# Altium PCB Notecarier-F.PcbDoc (part 2 of 3)
Units mm, origin at the board's own origin, x right, y up, seen from the top; angles counter-clockwise.
Board outline 50.8 x 103 mm, 4 copper layers (Top Layer, Mid Layer 3, Mid Layer 4, Bottom Layer), stack 1.58 mm thick; 102 components, 110 nets, 555 pads, 589 vias.
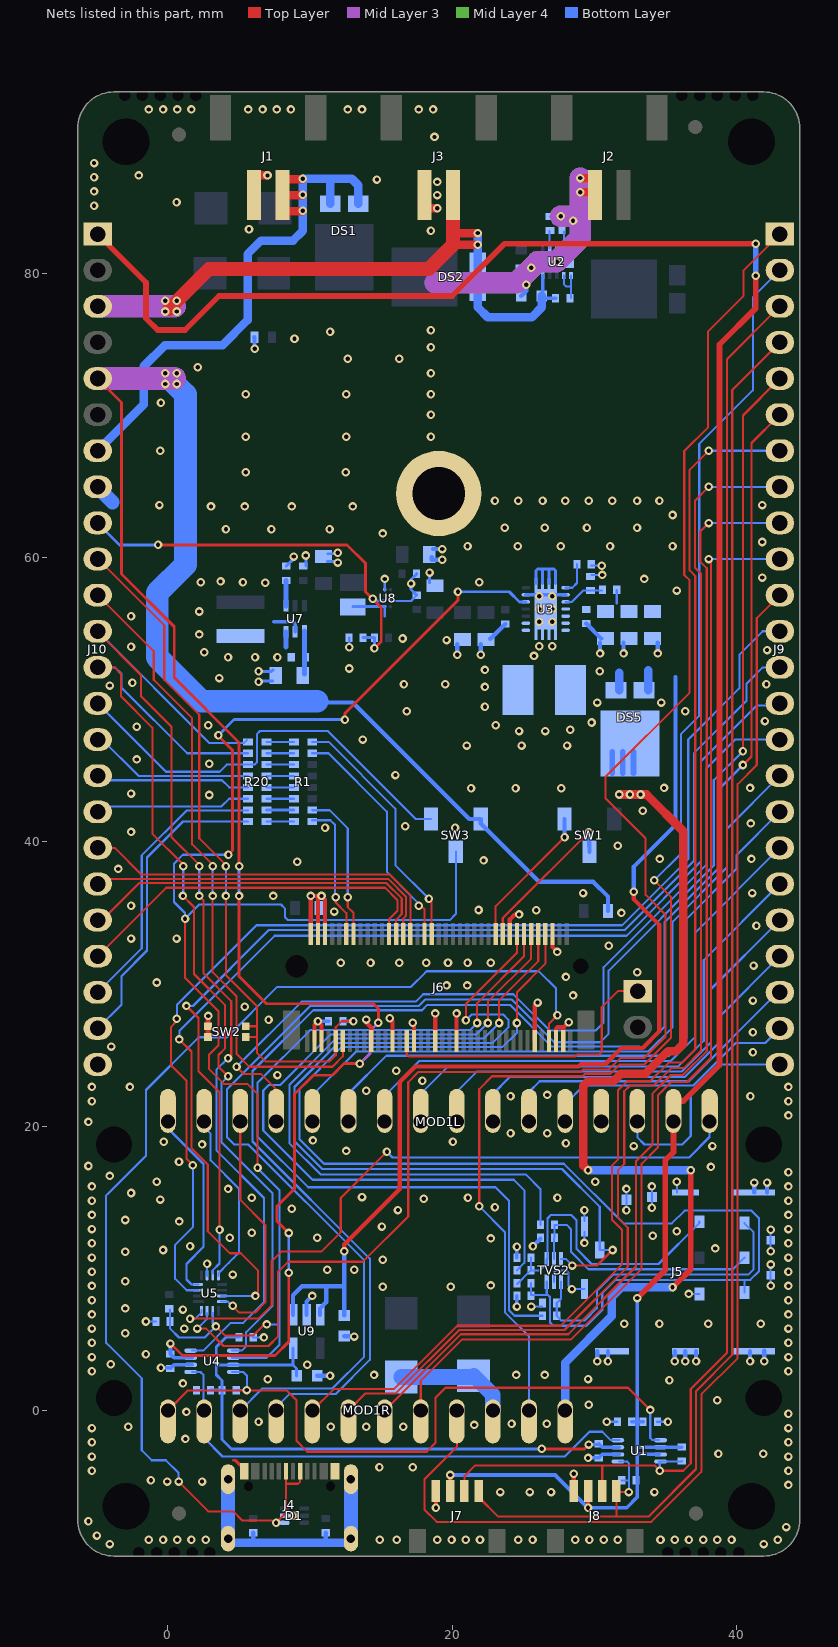
[diagram p4: the nets of this part, all layers, seen from the top]

## Via types
v1: diameter 0.6, hole 0.3, Top Layer to Bottom Layer, tented both sides, 589 vias

## Nets (pads, with @x,y where several pads share a name; then routed paths per layer and width w, separated by ;. In a path a pad name is that pad's centre, name@x,y a point inside that pad or via, vN(x,y) a via of type N, cw(c..) or ccw(c..) an arc to the next point about the centre after c; other vN are vias at no path point) (continued)
D_P: D1.1 J4.A6 J4.B6 J6.7 | length 82
  Top Layer w0.15: v1(0.75,-5) 0.75,-5.013 2.837,-7.1 4.593,-7.1 5.243,-7.75 7.328,-7.75 7.478,-7.9 v1(7.6,-7.9) 8.3,-7.2 8.3,-5.2 ; J4.A6@8.3,-4.267 8.3,-5.02 8.3,-5.2 ; J4.B6@9.275,-4.292 J4.B6@9.3,-4.267 9.3,-5.01 9.15,-5.16 8.34,-5.16 8.3,-5.2 ; J6.7@26.8,25.985 26.8,27.2 v1(27.4,27.8)
  Bottom Layer w0.15: v1(0.75,-5) 0.75,-4.4 -0.15,-3.5 -1.145,-3.5 -1.85,-2.795 -1.85,2.255 -4.247,4.653 -4.35,4.755 -4.35,15.13 -4.247,15.232 -1.55,17.93 -1.55,22.545 2.165,26.26 4.15,26.26 7.69,29.8 17.1,29.8 18.1,30.8 18.203,30.903 26.092,30.903 27.3,29.695 27.3,27.9 v1(27.4,27.8)
EN_F_BAT: C15.2 R18.2 SW3.2 U3.12 U4.6 U5.14 | length 118
  Top Layer w0.15: v1(1.2,34.6) 1.2,30.435 3.55,28.085 3.55,25.685 2.875,25.01 2.875,24.035 3.95,22.96 5.6,22.96 6.325,22.235 6.3,22.21 v1(6.3,17.08) ; v1(3.375,5.915) 4.005,5.285 6.01,5.285 6.225,5.5 6.775,6.05 v1(6.95,6.05)
  Top Layer w0.2: v1(3.55,47.5) 3.55,47.45 4.55,46.45 4.55,39.4 v1(4.25,39.1) ; v1(12.45,48.6) 12.45,49.05 20.4,57 v1(20.4,57.6)
  Bottom Layer w0.15: R18.2@0.15,7.11 C15.2@0.15,6.26 0.15,5.76 0.775,5.135 2.595,5.135 v1(3.375,5.915) 3.15,6.14 U5.14@3.15,6.86 ; v1(4.25,39.1) 1.05,39.1 0.425,38.475 0.425,35.775 1.2,35 v1(1.2,34.6) 2.2,35.6 7.95,35.6 8.225,35.325 8.225,34.718 8.443,34.5 19.825,34.5 20.25,34.925 SW3.2@20.25,39.31 ; U4.6@4.505,3.71 6.925,3.71 7.85,4.635 7.85,6.05 ; v1@6.3,17.043 7.85,15.493 7.85,6.05 ; v1(6.95,6.05) 7.85,6.05
  Bottom Layer w0.2: v1(3.55,47.5) 4.65,48.6 v1(12.45,48.6) ; v1(20.4,57.6) 24.01,57.6 24.725,56.885 U3.12@25.175,56.885
F_3V3: C12.1 J7.3 J8.3 J10.1 MOD1L.2 R10.2 R15.2 R16.1 U1.6 U1.7 | length 165.5
  Top Layer w0.3: J7.3@19.85,-5.651 v1(19.85,-4.54) ; v1(29.55,-6.851) J8.3@29.55,-5.651
  Top Layer w0.4: J10.1@-4.95,82.76 -1.55,79.36 -1.55,76.835 -0.725,76.01 1.205,76.01 3.595,78.4 19.99,78.4 23.675,82.085 v1(41.35,82.085) ; v1(33.02,7.91) 34.975,9.865 34.975,17.585 35.56,18.17 MOD1L.2@35.56,19.92 ; MOD1L.2@35.56,21.77 36.27,21.77 38.8,24.3 38.8,75 41.35,77.55 v1(41.35,79.835)
  Bottom Layer w0.25: v1(29.55,-6.851) 32.264,-6.851 33.025,-6.09 33.025,-3.09 ; C12.1@32.625,-0.79 33.025,-0.79 ; v1(33.02,7.91) 33.025,7.905 33.025,-0.79 ; R16.1@33.425,-0.79 33.025,-0.79 ; U1.7@34.555,-3.09 33.025,-3.09 ; R10.2@36.15,-2.59 34.555,-2.59 33.025,-2.59 ; 33.025,-3.09 33.025,-2.59 ; 33.025,-2.59 33.025,-0.79
  Bottom Layer w0.3: v1(19.85,-4.54) 27.239,-4.54 v1(29.55,-6.851)
  Bottom Layer w0.4: v1(41.35,79.835) v1(41.35,82.085)
F_A0: J9.23 MOD1L.5 | length 18.9
  Bottom Layer w0.15: MOD1L.5@27.94,19.92 27.94,21.55 29.25,22.86 36.95,22.86 39.94,25.85 42.02,25.85 J9.23@43.05,26.88
F_A1: J9.22 MOD1L.6 | length 23
  Bottom Layer w0.15: MOD1L.6@25.4,19.92 25.4,22.41 26.15,23.16 36.65,23.16 42.91,29.42 J9.22@43.05,29.42
F_A2: J9.21 MOD1L.7 | length 29.4
  Top Layer w0.15: MOD1L.7@22.86,19.92 MOD1L.7@22.86,21.745
  Bottom Layer w0.15: MOD1L.7@22.86,19.92 22.86,22.27 24.05,23.46 36.35,23.46 38.69,25.8 38.69,27.6 J9.21@43.05,31.96
F_A3: J9.20 MOD1L.8 | length 32.4
  Top Layer w0.15: MOD1L.8@20.32,19.92 MOD1L.8@20.32,21.755
  Bottom Layer w0.15: MOD1L.8@20.32,21.76 20.32,22.43 21.725,23.835 36.125,23.835 38.2,25.91 38.2,29.65 J9.20@43.05,34.5
F_A4: J9.19 MOD1L.9 | length 37.1
  Bottom Layer w0.15: MOD1L.9@17.78,22.28 19.71,24.21 35.9,24.21 37.69,26 37.69,31.68 J9.19@43.05,37.04
  Bottom Layer w0.2: MOD1L.9@17.78,19.92 MOD1L.9@17.78,22.28
F_A5: J9.18 MOD1L.10 | length 41.5
  Bottom Layer w0.15: MOD1L.10@15.24,22.15 17.675,24.585 35.375,24.585 37.083,26.293 37.083,33.613 J9.18@43.05,39.58
  Bottom Layer w0.2: MOD1L.10@15.24,19.92 MOD1L.10@15.24,22.15
F_AREF: J9.24 MOD1L.3 | length 14.9
  Bottom Layer w0.15: MOD1L.3@33.02,19.92 33.02,19.218 33.528,18.71 36.175,18.71 36.775,19.31 36.775,22.16 38.955,24.34 J9.24@43.05,24.34
F_B0: MOD1L.16 U5.4 | length 13.2
  Bottom Layer w0.15: MOD1L.16@0,19.92 0,19.835 2.5,17.335 2.5,11.51 1.3,10.31 1.3,9.21 1.65,8.86 U5.4@2.15,8.86
F_B0_SW: J9.12 U5.3 | length 82.2
  Top Layer w0.15: v1(0.625,27.56) 0.625,27.396 0.2,26.971 0.2,24.3 1.3,23.2 1.3,17.71 v1(1.75,17.26) v1@1.763,17.248
  Bottom Layer w0.15: v1(0.625,27.56) 0.625,28.527 6.231,34.134 31.949,34.134 36.6,38.785 36.6,47.2 40.2,50.8 40.2,53.179 41.841,54.82 J9.12@43.05,54.82 ; v1(1.75,17.26) 1.75,12.9 0.5,11.65 0.5,9.27 1.31,8.46 U5.3@2.15,8.46
F_BAT: DS5.3 MOD1R.1 | length 69.7
  Top Layer w0.4: v1(35.5,8.66) 36.775,9.935 v1(36.775,16.9)
  Top Layer w0.6: v1(29.55,16.9) 29.225,17.225 29.225,22.835 29.55,23.16 31.35,23.16 31.89,23.7 33.6,23.7 35.188,25.288 35.763,25.288 36.25,25.775 36.25,40.75 33.665,43.335 v1(31.75,43.335)
  Bottom Layer w0.4: DS5.3@31.25,44.835 DS5.3@31.25,46.335 ; DS5.3@32,44.835 DS5.3@32,46.335 ; DS5.3@32.75,44.835 DS5.3@32.75,46.335
  Bottom Layer w0.6: MOD1R.1@27.94,-0.4 27.94,3.35 31.225,6.635 31.225,8 31.885,8.66 v1(35.5,8.66) ; v1(29.55,16.9) v1(36.775,16.9)
  other v1: 32.5,43.335 33.25,43.335
F_D5: J9.5 MOD1R.10 | length 115.9
  Top Layer w0.15: v1(40.45,46.385) 40.45,70 J9.5@43.05,72.6
  Bottom Layer w0.15: MOD1R.10@5.08,-0.16 5.08,-0.01 6.64,1.55 11.565,1.55 13.8,3.785 13.8,10.56 5.65,18.71 4.65,18.71 4.15,19.21 4.15,22.61 10,28.46 17.65,28.46 18.1,28.91 24.174,28.91 27.174,25.91 30.4,25.91 31,26.51 31,30.935 38.4,38.335 38.4,44.335 v1(40.45,46.385)
F_D6: J9.6 MOD1R.9 | length 111.5
  Top Layer w0.15: v1(40.45,45.41) 41.05,46.01 41.05,68.06 J9.6@43.05,70.06
  Bottom Layer w0.15: MOD1R.9@7.62,-0.4 7.62,0.238 8.532,1.15 11.79,1.15 14.2,3.56 14.2,10.675 5.95,18.925 5.95,23.885 10.225,28.16 17.875,28.16 18.25,28.535 24.065,28.535 27,25.6 33.15,25.6 33.15,25.565 33.515,25.565 34.925,26.975 34.925,34.335 38.8,38.21 38.8,43.76 v1(40.45,45.41)
F_D9: J9.7 MOD1R.8 | length 93.5
  Top Layer w0.15: MOD1R.8@10.16,-0.4 MOD1R.8@10.16,-0.003 ; MOD1R.8@10.16,0 11.66,1.5 15.895,1.5 20.355,5.96 27.628,5.96 31.95,10.282 31.95,12.694 31.244,13.4 31.244,17.244 31.65,17.65 31.65,22.51 32.3,23.16 33.909,23.16 35.225,24.475 36.165,24.475 37.09,25.4 37.09,58.71 36.7,59.1 36.7,66.175 v1(38.05,67.525)
  Bottom Layer w0.15: v1@38.125,67.52 J9.7@43.05,67.52
F_D10: J9.8 MOD1R.7 | length 88.4
  Top Layer w0.15: MOD1R.7@12.7,0 13.9,1.2 16.019,1.2 20.479,5.66 27.894,5.66 32.35,10.116 32.35,12.86 31.65,13.56 31.65,16.9 32.1,17.35 32.1,22.46 32.5,22.86 34.175,22.86 35.4,24.085 36.285,24.085 37.5,25.3 37.5,58.875 37.075,59.3 37.075,64.01 v1(38.05,64.985)
  Bottom Layer w0.15: v1@38.125,64.98 J9.8@43.05,64.98
F_D11: J9.9 MOD1R.6 | length 82.5
  Top Layer w0.15: MOD1R.6@15.24,-0.4 15.24,-0.003 20.603,5.36 28.159,5.36 32.925,10.126 32.925,17.526 34.075,18.676 34.075,22.285 35.006,23.216 35.39,23.6 36.224,23.6 37.9,25.276 37.9,59.25 37.45,59.7 37.45,61.835 v1(38.05,62.435)
  Bottom Layer w0.15: v1@38.125,62.44 J9.9@43.05,62.44
F_D12: J9.10 MOD1R.5 | length 79
  Top Layer w0.15: MOD1R.5@17.78,-0.4 17.78,2.08 20.7,5 28.365,5 33.325,9.96 33.325,17.36 34.475,18.51 34.475,22.185 35.4,23.11 36.51,23.11 38.2,24.8 38.2,59.825 v1@38.125,59.9
  Mid Layer 4 w0.2: MOD1R.5@17.653,-0.273 MOD1R.5@17.78,-0.4
  Bottom Layer w0.15: v1@38.125,59.9 J9.10@43.05,59.9
  other v1: 38.05,59.9
F_D13: J9.11 MOD1R.4 | length 91.1
  Top Layer w0.15: MOD1R.4@20.32,-2.17 20.32,-2.57 18.05,-4.84 18.05,-6.99 18.9,-7.84 34,-7.84 37.525,-4.315 37.525,1.135 40.075,3.685 40.075,44.06 41.425,45.41 41.425,55.735 J9.11@43.05,57.36
  Mid Layer 4 w0.25: MOD1R.4@20.32,-0.4 MOD1R.4@20.421,-0.4
F_EN: J9.2 MOD1R.2 | length 97.6
  Top Layer w0.15: v1(21.9,14.36) 21.9,22.61 22.8,23.51 29.158,23.51 29.333,23.685 31.133,23.685 31.788,24.34 33.498,24.34 35.4,26.242 35.4,36.115 v1(34.215,37.3)
  Bottom Layer w0.15: v1(21.9,14.36) 23.7,12.56 23.7,6.911 25.4,5.211 MOD1R.2@25.4,-0.4 ; v1(34.215,37.3) 36.1,39.185 36.1,47.6 37.375,48.875 37.375,68 41.15,71.775 41.15,78.32 J9.2@43.05,80.22
F_MISO: J9.15 MOD1L.13 | length 60.4
  Top Layer w0.15: v1(4.825,24.185) 5.35,23.66 6.55,23.66 7.62,22.59 MOD1L.13@7.62,21.765
  Bottom Layer w0.15: v1(4.825,24.185) 9.4,28.76 17.425,28.76 17.95,29.285 24.3,29.285 26.85,26.735 30.089,26.735 30.65,27.296 30.65,31.185 37.9,38.435 37.9,45.2 39.9,47.2 J9.15@43.05,47.2
F_MOSI: J9.16 MOD1L.12 | length 50.4
  Bottom Layer w0.15: MOD1L.12@10.16,22.17 13.25,25.26 33.81,25.26 35.5,26.95 35.5,34.385 39.325,38.21 39.325,40.935 J9.16@43.05,44.66
  Bottom Layer w0.2: MOD1L.12@10.16,19.92 MOD1L.12@10.16,22.17
F_NRST: MOD1L.1 U5.16 | length 47.2
  Top Layer w0.15: v1(1.55,6.46) 6.35,6.46 7.3,7.41 7.3,10.51 7.965,11.175 10.775,11.175 12.15,12.55 12.15,14.95 v1(15.4,18.2)
  Bottom Layer w0.15: v1(1.55,6.46) 1.925,6.46 2.35,6.885 U5.16@2.35,7.06 ; v1(15.4,18.2) 15.8,17.8 36.662,17.8 38.1,19.238 MOD1L.1@38.1,19.92
F_NRST_SW: J9.1 U5.15 | length 115.7
  Top Layer w0.15: v1(2.05,5.76) 2.68,5.76 3.905,4.535 7.075,4.535 7.75,5.21 7.75,9.76 8.45,10.46 13.71,10.46 16.9,13.65 16.9,23.1 17.61,23.81 29.033,23.81 29.208,23.985 31.008,23.985 31.808,24.785 33.485,24.785 35,26.3 35,34.875 33.6,36.275 33.6,40.235 30.775,43.06 30.775,44.575 36.7,50.5 36.7,58.4 36.325,58.775 36.325,67.5 38,69.175 38,75.915 40.5,78.415 40.5,80.21 J9.1@43.05,82.76
  Bottom Layer w0.15: v1(2.05,5.76) 2.75,6.46 U5.15@2.75,6.86
F_RX: MOD1L.14 U5.12 | length 16.8
  Top Layer w0.15: v1(4.55,7.36) 5.025,6.885 6.125,6.885 6.85,7.61 6.85,13.05 5.08,14.82 MOD1L.14@5.08,19.92
  Bottom Layer w0.15: U5.12@3.75,7.66 4.225,7.66 4.525,7.36 v1(4.55,7.36)
F_RX_SW: J9.14 U5.11 | length 79.9
  Top Layer w0.15: v1(0.8,26.1) 1.65,25.25 1.65,18.45 2.8,17.3 2.8,12.61 4.35,11.06 5.125,11.06 6.325,9.86 6.325,8.185 6.35,8.16 6.25,8.06 v1(6.15,8.06)
  Bottom Layer w0.15: v1(0.8,26.1) 0.8,26.7 7.5,33.4 32.265,33.4 37.5,38.635 37.5,45.675 41.425,49.6 42.91,49.6 J9.14@43.05,49.74 ; U5.11@3.75,8.06 v1(6.15,8.06)
F_SCK: J9.17 MOD1L.11 | length 46.4
  Bottom Layer w0.15: MOD1L.11@12.7,22.3 15.36,24.96 35.25,24.96 36.49,26.2 36.49,34.59 40,38.1 40,39.07 J9.17@43.05,42.12
  Bottom Layer w0.2: MOD1L.11@12.7,19.92 MOD1L.11@12.7,22.3
F_SCL: MOD1R.11 R12.1 U1.4 U4.1 | length 36.9
  Bottom Layer w0.15: U4.1@1.695,2.71 2.29,2.71 2.49,2.51 MOD1R.11@2.49,-0.4 ; R12.1@2,1.435 2.49,1.435 ; MOD1R.11@2.54,0 2.54,-1.94 3.84,-3.24 27.91,-3.24 29.65,-1.5 30.55,-1.5 31.14,-2.09 U1.4@31.745,-2.09
F_SDA: MOD1R.12 R11.1 U1.5 U4.8 | length 47.9
  Top Layer w0.15: MOD1R.12@0,0 1.4,1.4 8.35,1.4 9.05,0.7 9.05,-2.15 9.8,-2.9 18.2,-2.9 18.824,-2.276 18.824,0.899 19.525,1.6 32.36,1.6 v1(33.925,0.035)
  Bottom Layer w0.15: U4.8@4.505,2.71 5.3,2.71 5.55,2.46 v1(5.55,1.435) R11.1@4.8,1.435 ; v1(33.925,0.035) 33.925,-1.925 34.09,-2.09 U1.5@34.555,-2.09
F_TX: MOD1L.15 U5.8 | length 12.1
  Bottom Layer w0.15: MOD1L.15@2.54,19.92 3,19.46 3,17.6 5,15.6 5,11.11 4.625,10.735 4.275,10.385 3.55,9.66 U5.8@3.55,9.46
F_TX_SW: J9.13 U5.7 | length 76.7
  Top Layer w0.15: v1(1.3,28.46) 2.15,27.61 2.15,23.86 3.625,22.385 v1(3.625,12.71)
  Bottom Layer w0.15: v1(1.3,28.46) 1.76,28.46 7.1,33.8 32.14,33.8 37,38.66 37,46.23 40.7,49.93 40.7,51.139 41.841,52.28 J9.13@43.05,52.28 ; U5.7@3.15,9.63 3.15,9.86 3.625,10.335 v1(3.625,12.71)
F_VIO: C11.1 C14.1 C34.2 R11.2 R12.2 U1.3 U4.7 U9.5 | length 45.4
  Top Layer w0.2: v1(26.3,-2.7) 29.3,-2.7 v1(29.6,-2.4)
  Bottom Layer w0.2: R12.2@3,1.435 R11.2@3.8,1.435 ; C14.1@5.075,5.16 4.1,5.16 3.4,4.46 3.4,3.21 ; U9.5@8.797,4.385 8.797,3.21 ; C34.2@9.05,2.435 9.05,2.957 8.797,3.21 ; v1(26.3,-2.7) 4.46,-2.7 3.8,-2.04 R11.2@3.8,1.435 ; v1(29.6,-2.4) 30.24,-2.4 C11.1@30.3,-2.34 ; 3.4,3.21 4.505,3.21 8.797,3.21 ; 3.4,3.21 3.4,2.51 3.8,2.11 R11.2@3.8,1.435
  Bottom Layer w0.25: C11.1@30.3,-2.34 30.55,-2.59 U1.3@31.745,-2.59
F_VUSB: DS6.2 DS8.2 MOD1R.3 | length 8.2
  Bottom Layer w1.1: DS8.2@16.4,2.35 21.4,2.35 DS6.2@21.5,2.45 22.86,1.09 MOD1R.3@22.86,0
GND: C1.1 C2.1 C5.1 C6.1 C7.1 C8.1 C9.1 C11.2 C12.2 C13.2 C14.2 C15.1 C16.1 C17.1 C18.1 C19.1 C20.2 C21.1 C22.2 C23.2 C24.2 C25.1 C26.1 C27.1 C28.1 C29.2 C30.1 C31.1 C32.1 C33.1 C34.1 D1.2 J1.1 J2.1 J3.1 J4.A1 J4.A12 J4.B1 J4.B12 J4.M J5.5 J5.8 J5.9 J5.10 J5.11 J5.12 J5.14 J5.15 J5.16 J5.17 J5.18 J5.19 J6.3 J6.5 J6.6 J6.11 J6.18 J6.33 J6.39 J6.45 J6.51 J6.57 J6.71 J6.73 J7.4 J8.4 J10.8 J10.24 MOD1L.4 OBJ1.1 R3.1 R4.1 R5.1 R14.1 R16.2 R17.2 R21.2 SW2.2 TVS1.1 TVS2.2 U1.2 U2.3 U2.11 U3.2 U3.13 U3.15 U4.2 U5.6 U7.3 U8.B2 U8.D1 U9.2 | length 154.7
  Top Layer w0.2: 4.6,-3.5 4.733,-3.5 J4.B12@5.5,-4.267
  Top Layer w0.3: J6.73@10.3,25.985 10.3,27.135 v1(10.55,27.385) 10.8,27.135 J6.71@10.8,25.985 ; v1@14,27.5 v1(13.95,27.5) 13.95,27.286 14.3,26.936 J6.57@14.3,25.985 ; v1(15.6,27.6) 15.8,27.4 J6.51@15.8,25.985 ; J6.45@17.3,25.985 v1@17.3,27.285 ; J6.39@18.8,25.985 v1(18.8,27.935) ; v1(18.85,-6.851) J7.4@18.85,-5.651 ; J6.33@20.3,25.985 v1(20.3,27.935) ; J6.18@24.05,33.535 24.05,34.55 24.4,34.9 v1(24.7,34.9) ; J6.11@25.8,25.985 25.8,28.5 v1(26,28.7) ; J6.6@27.05,33.535 27.05,32.599 v1(27.389,32.26) ; J6.5@27.3,25.985 27.3,26.86 27.411,26.971 27.861,26.971 v1(28.2,27.31) ; J6.3@27.8,25.985 27.8,26.91 ; J8.4@28.55,-5.651 v1(28.55,-4.451)
  Top Layer w0.35: SW2.2@2.825,26.285 SW2.2@2.825,27.035 v1(2.825,27.76)
  Top Layer w0.6: J1.1@6.1,86.81 6.1,86.885 v1(7,86.885) ; J3.1@17.95,86.435 J3.1@18.05,86.435 ; J3.1@18.05,84.585 v1(18.95,84.585) ; v1(29,85.7) J2.1@30,85.7 ; v1(29,86.7) J2.1@30.1,86.7
  Mid Layer 3 w1.5: 18.81,79.335 24.528,79.335 26,80.807 v1@27.322,80.807 ; v1@27.353,80.838 29.008,82.492 29.008,86.692 v1(29,86.7) ; v1(27.625,84.01) 28.998,84.01
  Mid Layer 4 w1: OBJ1.1@19.55,64.51 19.55,65.86
  Mid Layer 4 w1.5: 18.81,79.335 24.528,79.335 26,80.807 v1@27.322,80.807 ; v1@27.353,80.838 29.008,82.492 v1@29.008,86.692 ; v1(27.625,84.01) 28.998,84.01
  Bottom Layer w0.15: v1(-1.55,6.26) C15.1@-0.85,6.26 ; U5.6@2.75,9.46 v1(2.75,10.325) ; C14.2@6,5.135 v1(6.75,5.135) ; U8.B2@15.65,56.95 17.1,56.95 C26.1@17.5,57.35 ; v1(25.55,7.31) C7.1@26.303,7.31 ; R3.1@26.875,84.01 v1(27.625,84.01) ; TVS2.2@27.15,9.055 27.15,9.71 27.3,9.86 28,9.86 28.175,9.685 28.175,8.785 v1(28.42,8.54) J5.14@29.3,8.54 ; v1(28.5,83.7) 28.5,83.285 R4.1@28.725,83.06 ; v1(29.3,11.79) J5.12@29.3,12.54 ; J5.12@29.3,13.34 v1(29.3,14.09) ; C18.1@29.775,59.435 v1(30.525,59.435) ; R14.1@29.8,58.785 v1(30.55,58.785) ; v1(30.875,-0.79) C12.2@31.625,-0.79 ; v1(32.25,14.085) J5.11@32.25,14.835 v1(32.25,15.585) ; v1(34.05,14.26) J5.10@34.05,15.01 v1(34.05,15.76) ; R16.2@34.425,-0.79 v1(35.175,-0.79) ; J5.9@35.8,15.335 v1(35.8,16.085) ; v1(36.63,8.2) J5.5@37.38,8.2 ; v1(42.4,8.77) J5.18@42.4,9.52 v1(42.4,10.27) ; v1(42.4,11.21) J5.19@42.4,11.96 v1(42.4,12.71)
  Bottom Layer w0.2: v1@6.375,51.325 C29.2@7.365,51.325 ; v1(6.375,52) 7.275,52 7.375,52.1 C29.2@7.4,52.075 ; R17.2@8.325,59.4 8.85,59.925 v1(8.85,60.075) ; C28.1@9.7,59.4 v1(9.7,60.15) ; C21.1@11.2,59.725 v1@11.95,59.725 ; C21.1@11.235,60.275 v1@11.985,60.275 ; v1(12.75,53.7) C31.1@12.75,54.35 ; U8.D1@15.25,57.75 v1(15.25,58.5) ; C32.1@17.475,58.875 17.5,58.85 17.1,58.45 v1(17.1,58.175) 17.1,57.75 C26.1@17.5,57.35 ; C27.1@18.4,58.235 v1(18.4,58.95) ; U3.15@25.885,58.185 25.885,59.085 26,59.2 27.15,59.2 27.265,59.085 U3.15@27.265,58.185 ; U3.15@26.345,58.185 26.345,59.095 ; U3.15@26.805,58.185 26.805,59.095
  Bottom Layer w0.25: v1(-0.5,3) 0.135,3 C13.2@0.175,2.96 0.425,3.21 U4.2@1.695,3.21 ; v1(10.55,27.385) C9.1@11.3,27.385 ; v1(24.55,7.31) C5.1@24.55,8.06 ; C8.1@24.55,10.76 v1(24.55,11.51) ; U3.13@25.175,57.385 U3.2@27.975,57.385 ; v1(27.353,80.807) U2.3@27.353,81.757 ; v1(29.55,-3.34) C11.2@30.3,-3.34 30.55,-3.09 U1.2@31.745,-3.09
  Bottom Layer w0.3: 6,-9.3 R5.1@6,-8.6 ; TVS1.1@6.075,75.5 6.088,75.487 6.088,74.712 v1(6.1,74.7) ; U9.2@9.747,6.735 9.747,7.657 v1(10.15,8.06) ; C34.1@10.5,2.435 v1(11.4,2.435) ; 11.1,-9.3 R21.2@11.1,-8.6 ; C33.1@12.4,5.235 12.418,5.218 13.082,5.218 v1(13.1,5.2) ; C20.2@18.55,60.05 18.55,59.85 v1(19.3,59.85) ; C20.2@18.65,60.6 v1(19.3,60.6) ; v1(20.35,53.16) C17.1@20.35,53.91 ; v1(22,53.16) C16.1@22,53.91 ; C16.1@22.675,54.285 C30.1@23.725,55.335 ; C2.1@24.85,78.41 25.2,78.76 v1(25.2,79.2) ; C1.1@24.985,80.4 v1(25.55,80.4) ; v1(25.675,11.56) C6.1@26.2,12.085 ; C25.1@29.425,55.36 C23.2@30.475,54.31 ; v1(30.2,3.46) J5.15@30.2,4.16 ; v1(30.4,53.26) C23.2@30.4,54.01 ; v1(30.95,3.46) J5.15@30.95,4.16 ; v1(32.05,53.26) C24.2@32.05,54.01 ; v1(34.45,53.26) C22.2@34.45,54.01 ; v1(35.65,3.46) J5.16@35.65,4.16 ; v1(36.4,3.46) J5.16@36.4,4.16 ; v1(37.15,3.46) J5.16@37.15,4.16 ; v1(40.95,3.46) J5.17@40.95,4.16 ; J5.8@41.25,15.335 v1(41.25,16.035) ; v1(41.95,3.46) J5.17@41.95,4.21 ; J5.8@42.15,15.335 v1(42.15,16.035)
  Bottom Layer w0.35: 8.3,53.725 U7.3@8.3,54.775
  Bottom Layer w0.6: J4.M@4.23,-9.012 4.23,-9.115 4.415,-9.3 6,-9.3 11.1,-9.3 12.685,-9.3 12.87,-9.115 J4.M@12.87,-9.012
  Bottom Layer w1: J10.8@-4.95,64.98 -4.95,64.95 -3.9,63.9 ; J4.M@4.23,-9.012 J4.M@4.23,-4.832 ; J4.M@12.87,-9.012 J4.M@12.87,-4.832
  other v1: -4.1,-9.4 41.91,-9.4 14.9,-9.1 16.1,-9.1 -1.35,-9.09 -0.35,-9.09 0.65,-9.09 1.65,-9.09 2.65,-9.09 18.95,-9.09 19.95,-9.09 20.95,-9.09 21.95,-9.09 24.65,-9.09 25.65,-9.09 28.65,-9.09 29.65,-9.09 30.65,-9.09 31.65,-9.09 34.65,-9.09 35.65,-9.09 36.65,-9.09 37.65,-9.09 38.65,-9.09 39.65,-9.09 42.9,-9.09 -5,-8.8 43.5,-8.2 -5.6,-7.8 8.8,-7.4 23.375,-5.74 25.45,-5.74 26.95,-5.74 34.225,-5.74 43.65,-5.24 -0.05,-5 2.4,-5 -1.2,-4.9 -5.35,-4.24 43.65,-4.24 14.875,-4 17.225,-4 -5.35,-3.24 43.65,-3.24 38.725,-3.04 41.875,-3.04 -5.35,-2.24 43.65,-2.24 1.225,-2 -5.35,-1.24 43.65,-1.24 -2.8,-1.14 11.45,-1.14 13.95,-1.14 16.55,-1.14 21.55,-1.015 24.175,-0.94 26.65,-0.94 6.375,-0.79 43.65,-0.24 1.3,-0.1 29.6,0.4 38.65,0.71 1.05,1.9 35.275,2.135 7.025,2.2 29.55,2.21 14.5,2.5 24.5,2.5 26.5,2.5 -5.35,2.76 43.65,2.76 9.8,3.21 -4.025,3.26 -5.35,3.76 43.65,3.76 -1.55,3.95 -5.35,4.76 43.65,4.76 -3,5.425 -5.35,5.76 1.15,5.76 43.65,5.76 32.1,6.1 34.575,6.1 38,6.1 41.7,6.1 -5.35,6.76 43.65,6.76 1.05,7.1 -3,7.175 -5.35,7.76 43.65,7.76 15.1,8.7 19.9,8.7 -5.35,8.76 43.65,8.76 22.7,8.8 -3,9.1 4.55,9.56 -5.35,9.76 43.65,9.76 11.2,9.9 13.1,9.9 15.1,10.6 -5.35,10.76 43.65,10.76 -3,11.175 -0.35,11.29 38.5,11.4 1.55,11.56 -5.35,11.76 43.65,11.76 22.7,12.1 4.35,12.16 10.5,12.16 34.1,12.3 5.9,12.5 35.8,12.6 -5.35,12.76 43.65,12.76 15.05,12.94 0.8,13.3 -3,13.4 -5.35,13.76 43.65,13.76 16.175,14.1 8.7,14.2 23,14.3 -5.35,14.76 43.65,14.76 -0.55,14.835 18,14.9 5.9,14.96 21.1,14.96 27.4,14.96 13.65,15.01 -2.6,15.3 4.23,15.585 -5.35,15.76 43.65,15.76 30.05,16.085 -0.8,16.1 -4.1,16.5 43.65,16.76 38.2,17.135 -5.6,17.2 0.775,17.5 12.55,18.26 32.775,18.6 38.3,18.6 2.4,18.72 28,18.8 -0.3,18.9 20.05,18.9 10.2,19 24.1,19.5 26.675,19.5 -5.6,20.3 43.65,20.76 -5.35,21.76 43.65,21.76 24.1,22.1 40.975,22.1 26.675,22.2 13.95,22.5 -5.35,22.76 -2.675,22.76 43.65,22.76 17.9,23.2 7.7,23.6 16.05,23.9 41.15,25.2 -4,25.6 41.15,26.6 17.225,27.285 7.075,27.485 5.4,28.4 41.15,28.835 28.5,29.2 19.6,29.9 21.05,29.9 -0.8,30.11 28,30.5 33.02,30.825 41.2,31.3 12.15,31.5 14.25,31.5 16.275,31.5 18.175,31.5 19.7,31.5 21.075,31.5 22.7,31.5 31,32.7 -2.6,33.2 0.6,33.2 41.4,34.1 31.9,35 11.7,35.1 25.9,35.2 21.85,35.21 -2.6,35.5 7.4,36.2 29.2,36.4 41.1,36.4 -3.5,38.1 9.1,38.6 22.2,38.7 34.6,38.8 41.05,38.8 31.65,39.725 -2.6,40.7 11.05,41 20.2,41 16.7,41.1 41,41.3 33.4,42.2 2.9,43.3 -2.6,43.4 21.325,43.775 24.45,43.775 27.675,43.775 34.9,43.8 40.95,43.8 16,44.7 2.9,45.5 -2.2,45.8 21.025,46.775 24.875,46.775 28.075,46.775 13.7,47.2 24.7,47.8 26.55,47.8 28.3,47.9 -2.2,48.1 2.825,48.2 23.05,48.2 29.8,48.4 42,48.5 16.8,49.2 36.4,49.2 22.3,49.5 30.2,49.8 34.7,49.8 22.3,50.9 -4.1,51 16.6,51.1 19.5,51.1 42.1,51.1 -2.5,51.2 6.375,51.275 3.6,51.525 30.375,52 22.3,52.1 12.75,52.2 4.225,53 6.125,53 7.7,53 25.75,53.085 2.55,53.35 42.15,53.5 -2.6,53.735 26.125,53.76 27.025,53.76 19.6,54.2 16.5,54.31 2.2,54.6 26.125,55.485 27.025,55.485 -2.6,55.885 2.2,56.21 26.125,56.385 27.025,56.385 26.125,57.285 27.025,57.285 35.8,57.685 6.85,58.235 2.3,58.275 5.275,58.275 21.9,58.275 3.7,58.325 33.5,58.5 41.8,58.6 11.95,59.65 11.95,60.35 21.075,60.8 24.6,60.8 27.625,60.8 31.1,60.8 35.5,60.8 41.8,61.1 15.1,61.7 4.075,62 7.275,62 11.365,62 23.7,62.1 26.5,62.1 29.475,62.1 33,62.1 35.5,63 3.025,63.6 5.4,63.6 8.7,63.6 13,63.6 -0.6,63.7 41.8,63.7 23,64 24.65,64 26.353,64 27.94,64 29.6,64 31.25,64 33,64 34.575,64 5.475,66 12.5,66 -0.55,67.525 5.475,68.5 12.55,68.5 18.5,68.5 18.5,70.06 -0.5,70.9 5.475,71.5 12.55,71.5 18.5,71.5 18.5,72.965 2.1,73.4 12.65,74 16.275,74 18.5,74.8 8.9,75.4 11.4,75.9 18.5,76 18.5,83 5.7,83.1 -5.2,84.76 0.6,85 18.95,85.51 -5.2,85.76 18.95,86.435 14.7,86.6 -5.2,86.76 -2.05,86.885 -5.2,87.76 18.75,89.6 -1.35,91.535 -0.35,91.535 0.65,91.535 1.65,91.535 5.65,91.535 6.65,91.535 7.65,91.535 8.65,91.535 12.65,91.535 13.65,91.535 17.65,91.535 18.65,91.535
N_ATTN: J10.14 R20.6 SW3.1 | length 30.3
  Bottom Layer w0.15: J10.14@-4.95,49.74 -0.145,44.935 3.635,44.935 4.135,45.435 R20.6@5.625,45.435 6.085,45.435 6.25,45.6 6.25,47.575 6.475,47.8 11.25,47.8 17.44,41.61 SW3.1@18.5,41.61
N_AUX1: J6.46 J10.18 | length 26.1
  Top Layer w0.15: J10.18@-4.95,39.58 -3.745,39.58 -1.865,37.7 15.624,37.7 17.05,36.274 J6.46@17.05,33.535
N_AUX2: J6.48 J10.19 | length 25.1
  Top Layer w0.15: J10.19@-4.95,37.04 -4.59,37.4 15.499,37.4 16.75,36.149 16.75,34.8 16.55,34.6 J6.48@16.55,33.535
N_AUX3: J6.50 J10.20 | length 25.6
  Top Layer w0.15: J10.20@-4.95,34.5 -4.642,34.5 -2.042,37.1 15.375,37.1 16.45,36.025 16.45,34.924 16.05,34.524 J6.50@16.05,33.535
N_AUX4: J6.52 J10.21 | length 26.1
  Top Layer w0.15: J10.21@-4.95,31.96 -0.134,36.776 15.275,36.776 16.15,35.901 16.15,35.15 15.55,34.55 J6.52@15.55,33.535
N_AUX_EN: J10.15 R20.5 | length 11.7
  Bottom Layer w0.15: J10.15@-4.95,47.2 -4.89,47.26 -4.685,47.26 -2.06,44.635 R20.5@5.625,44.635
N_AUX_RX: J10.16 R20.4 | length 10.9
  Bottom Layer w0.15: J10.16@-4.95,44.66 -4.625,44.335 3.8,44.335 4.3,43.835 R20.4@5.625,43.835
N_AUX_TX: J10.17 R20.3 | length 11
  Bottom Layer w0.15: J10.17@-4.95,42.12 -4.57,42.5 3.765,42.5 4.3,43.035 R20.3@5.625,43.035
N_BOOT: J6.65 J10.11 | length 45.4
  Top Layer w0.15: J10.11@-4.95,57.36 -1,53.41 -1,51.4 1.7,48.7 1.7,39.825 v1@3.14,38.385 ; v1@3.14,36.2 3.14,30.82 4.825,29.135 4.825,25.085 5.725,24.185 11.575,24.185 12.3,24.91 J6.65@12.3,25.985
  Bottom Layer w0.15: v1@3.14,36.2 v1(3.14,38.285)
  other v1: 3.15,36.2
N_EN: C31.2 J10.9 R19.1 U8.B1 | length 29
  Top Layer w0.2: v1(-0.7,60.9) 12.6,60.9 13.9,59.6 13.9,57.6 v1(14.4,57.1) 15,56.5 15,54.1 v1(14.525,53.625)
  Bottom Layer w0.2: J10.9@-4.95,62.44 -3.41,60.9 v1(-0.7,60.9) ; C31.2@13.725,54.375 R19.1@14.525,54.375 v1(14.525,53.625) ; v1@14.5,56.95 U8.B1@15.25,56.95
N_NRST: C9.2 J6.67 J10.10 SW2.1 | length 51.3
  Top Layer w0.15: J10.10@-4.95,59.35 -4.375,59.35 -0.26,55.235 -0.26,51.41 2.2,48.95 2.2,40.26 v1@4.075,38.385 ; J10.10@-4.35,59.35 J10.10@-4.35,59.9 ; v1(4.075,36.2) 4.075,30.635 6.25,28.46 6.25,25.16 6.85,24.56 11.375,24.56 11.8,24.985 J6.67@11.8,25.985 11.8,26.96 12.225,27.385 v1(13.05,27.385) ; SW2.1@5.475,26.285 6.25,26.285 ; SW2.1@5.475,27.035 6.25,27.035
  Bottom Layer w0.15: v1(4.075,36.2) v1(4.075,38.285)
  Bottom Layer w0.25: C9.2@12.3,27.385 v1(13.05,27.385)
N_RX: J10.22 R20.2 | length 19.7
  Bottom Layer w0.15: J10.22@-4.95,29.42 -1.85,32.52 -1.85,39.05 1.3,42.2 5.59,42.2 R20.2@5.625,42.235
N_SCL: J10.12 R20.8 U4.4 | length 73.1
  Top Layer w0.15: J10.12@-4.95,54.78 -1.9,51.73 -1.9,50.25 0.25,48.1 0.25,40.335 v1@2.2,38.385 ; v1(2.2,36.2) 2.5,35.9 2.5,30.75 4.45,28.8 4.45,24.935 v1@4.3,24.785
  Bottom Layer w0.15: J10.12@-4.95,54.82 2.92,46.95 5.34,46.95 R20.8@5.55,47.16 ; U4.4@1.695,4.21 2.475,4.21 4.425,6.16 5.3,6.16 6.75,7.61 6.75,14.95 3.4,18.3 3.4,23.96 v1(4.225,24.785) ; v1(2.2,36.2) v1(2.2,38.285)
N_SDA: J10.13 R20.7 U4.5 | length 69.8
  Top Layer w0.15: J10.13@-4.95,52.28 -3.755,52.28 -3.3,51.825 -3.3,50.233 -1.1,48.033 -1.1,40.575 1.033,38.442 v1@1.133,38.442 ; v1(1.05,36.2) 1.825,35.425 1.825,30.711 4,28.536 4,25.46 3.55,25.01 3.55,24.185 v1(4.225,23.51)
  Bottom Layer w0.15: J10.13@-4.95,52.28 -3.741,52.28 -3.27,51.809 -3.27,50.853 1.348,46.235 R20.7@5.625,46.235 ; v1@1.075,36.2 v1(1.075,38.285) ; v1(4.225,23.51) 3.775,23.06 3.775,18.85 7.35,15.275 7.35,7.36 5.5,5.51 5.5,4.51 5.2,4.21 U4.5@4.505,4.21
N_TX: J10.23 R20.1 | length 21.6
  Bottom Layer w0.15: J10.23@-4.95,26.88 -3.275,28.555 -3.275,30.56 -1.475,32.36 -1.475,38.9 1.06,41.435 R20.1@5.625,41.435
N_VIO: C13.1 C19.2 C29.1 F1.1 J10.5 SW3.3 U4.3 U7.1 | length 166.4
  Top Layer w0.2: J10.5@-4.95,72.6 -3.275,70.925 -3.275,58.85 0.437,55.138 0.437,51.567 5.005,47 v1@5.005,38.385 ; v1(0.175,4.71) 1.025,3.86 7.525,3.86 8.5,4.835 v1(8.5,9.685) ; v1@5.005,36.2 5.005,30.545 6.94,28.61 14.45,28.61 14.8,28.26 v1(14.8,27.285) ; v1(8.5,12.485) 7.65,13.335 7.65,14.35 8.9,15.6 8.9,22.26 10.225,23.585 11.575,23.585 12.39,24.4 v1(13.5,24.4)
  Mid Layer 3 w0.2: v1(13.5,24.4) 14.2,25.1 14.2,26.685 v1(14.8,27.285)
  Mid Layer 3 w1.6: J10.5@-4.95,72.6 0.475,72.6
  Bottom Layer w0.2: v1(5,36.2) 5,38.28 v1(5.005,38.285) ; v1(8.5,9.685) v1(8.5,12.485)
  Bottom Layer w0.25: v1(0.175,4.71) C13.1@0.175,3.96 0.425,3.71 U4.3@1.695,3.71
  Bottom Layer w0.3: 9.7,49.8 13,49.8 21.19,41.61 SW3.3@22,41.61 22,41.3 26.1,37.2 29.91,37.2 30.95,36.16 F1.1@30.95,35.135
  Bottom Layer w0.35: C29.1@9.6,51.8 U7.1@9.6,54.825
  Bottom Layer w1.6: 0.1,72.6 1.225,71.475 1.225,59.5 -0.75,57.525 -0.75,52.99 2.34,49.9 10.5,49.9
  other v1: -0.2,72.215 0.625,72.215 -0.2,72.965 0.625,72.965
NetC6_2: C6.2 J5.2 R7.2 TVS2.5 | length 18.3
  Bottom Layer w0.15: TVS2.5@27.15,10.665 C6.2@27.15,12.11 ; C6.2@27.2,12.16 R7.2@27.2,13.06 28.05,13.06 28.35,12.76 28.35,11.16 29.575,9.935 39.745,9.935 J5.2@40.55,10.74
NetC7_2: C7.2 J5.3 R8.2 TVS2.1 | length 22.2
  Bottom Layer w0.15: TVS2.1@27.65,9.055 27.65,7.86 C7.2@27.35,7.56 R8.2@27.35,6.66 27.675,6.335 29.32,6.335 30.175,7.19 30.175,8.41 31.325,9.56 40.825,9.56 41.2,9.935 41.2,12.53 J5.3@40.55,13.18
NetC8_2: C8.2 J5.7 R6.1 R9.2 TVS2.4 | length 21.3
  Bottom Layer w0.15: R6.1@24.55,8.885 R9.2@25.45,9.785 ; C8.2@25.55,10.76 R9.2@25.55,9.86 26.2,9.86 26.65,10.31 TVS2.4@26.65,10.665 ; TVS2.4@26.7,10.665 26.7,13.51 26.95,13.76 28.35,13.76 28.75,13.36 28.75,11.36 29.8,10.31 34.51,10.31 37.38,13.18 J5.7@37.38,13.28
NetC18_2: C18.2 U3.1 | length 2.3
  Bottom Layer w0.15: U3.1@27.975,57.885 28.45,57.885 28.775,58.21 C18.2@28.775,59.535
NetC22_1: C22.1 C23.1 C24.1 C25.2 C33.2 DS5.1 DS5.2 R13.2 U3.4 U3.5 U9.1 U9.3 | length 75.7
  Top Layer w0.3: v1(12.4,11.21) 12.4,11.685 16.3,15.585 16.3,23.1 17.4,24.2 28.893,24.2 29.053,24.36 30.76,24.36 31.9,25.5 33.4,25.5 34.555,26.655 34.555,34.18 32.775,35.96 v1(32.775,36.5)
  Bottom Layer w0.15: 31.575,56.785 R13.2@31.575,57.735
  Bottom Layer w0.3: U9.1@8.797,6.735 8.797,8.107 9.425,8.735 11.125,8.735 ; U9.3@10.697,6.735 10.697,7.182 11.125,7.61 11.125,8.735 ; C33.2@12.4,6.685 12.4,8.735 ; v1(12.4,11.21) 12.4,8.735 ; v1(32.775,36.5) 32.775,38.275 35.7,41.2 35.7,51.6 ; 11.125,8.735 12.4,8.735
  Bottom Layer w0.6: DS5.2@31.76,50.66 31.76,51.915 ; DS5.1@33.785,50.66 33.785,52.065
NetF2_2: F2.2 J6.70 J6.72 J6.74 | length 9.1
  Top Layer w0.3: J6.74@10.05,33.535 v1(10.05,36.2) ; v1@10.31,36.2 v1(10.8,36.2) 11.05,35.95 J6.70@11.05,33.535 ; J6.72@10.55,33.535 10.55,36.16 v1@10.59,36.2
  Bottom Layer w0.3: v1(10.05,36.2) v1@10.59,36.2
NetJ6_20: J6.20 SW1.2 | length 11
  Top Layer w0.15: J6.20@23.55,33.535 23.55,34.65 24.075,35.175 v1(29.6,40.685)
  Bottom Layer w0.3: v1(29.6,40.685) SW1.2@29.65,39.31
NetJ6_22: J6.22 SW1.1 | length 10.1
  Top Layer w0.15: J6.22@23.05,33.535 23.05,35.485 v1(27.9,40.335)
  Bottom Layer w0.3: v1(27.9,40.335) SW1.1@27.9,41.61
NetJ6_40: J6.40 R1.9 | length 17.6
  Top Layer w0.15: v1(18.36,36) 18.546,35.814 J6.40@18.546,33.539
  Bottom Layer w0.15: R1.9@10.15,47.035 11.3,47.035 16,42.335 16,38.36 v1(18.36,36)
NetJ6_42: J6.42 R1.10 | length 16.7
  Top Layer w0.15: v1(17.65,35.51) 17.79,35.51 18.042,35.258 J6.42@18.042,33.543
  Bottom Layer w0.15: R1.10@10.15,46.235 11.29,46.235 15.4,42.125 15.4,37.9 17.65,35.65 v1(17.65,35.51)
NetL1_1: L1.1 U7.2 | length 2.1
  Bottom Layer w0.25: 7.45,55.475 8.825,55.475 8.95,55.35 U7.2@8.95,54.775
NetL2_1: L2.1 U3.6 U3.7
NetL2_2: L2.2 U3.8 U3.9
NetL3_2: L3.2 U8.A1 | length 2.9
  Bottom Layer w0.15: L3.2@13,56.515 L3.2@13.035,56.55
  Bottom Layer w0.2: L3.2@13.035,56.55 U8.A1@15.25,56.55 15.25,55.875
NetR1_1: R1.1 R20.16 | length 1.9
  Bottom Layer w0.15: R20.16@6.925,41.435 R1.1@8.85,41.435
NetR1_2: R1.2 R20.15 | length 1.9
  Bottom Layer w0.2: R20.15@6.925,42.235 R1.2@8.85,42.235
NetR1_3: R1.3 R20.14 | length 1.9
  Bottom Layer w0.15: R20.14@6.925,43.035 R1.3@8.85,43.035
NetR1_4: R1.4 R20.13 | length 1.9
  Bottom Layer w0.15: R20.13@6.925,43.835 R1.4@8.85,43.835
NetR1_5: R1.5 R20.12 | length 1.9
  Bottom Layer w0.15: R20.12@6.925,44.635 R1.5@8.85,44.635
NetR1_6: R1.6 R20.11 | length 1.9
  Bottom Layer w0.15: R20.11@6.925,45.435 R1.6@8.85,45.435
NetR1_7: R1.7 R20.10 | length 1.9
  Bottom Layer w0.15: R20.10@6.925,46.235 R1.7@8.85,46.235
NetR1_8: R1.8 R20.9 | length 1.9
  Bottom Layer w0.15: R20.9@6.925,47.035 R1.8@8.85,47.035
NetR2_1: R2.1 U2.6 U2.7 | length 2.8
  Bottom Layer w0.15: U2.7@27.853,79.857 27.853,79.232 28,79.085 28.353,79.085 ; R2.1@28.353,78.26 U2.6@28.353,79.857
NetR3_2: R3.2 U2.2 | length 1.2
  Bottom Layer w0.15: U2.2@26.853,81.757 R3.2@26.853,82.988
NetR4_2: R4.2 U2.4 U2.5 | length 2.3
  Bottom Layer w0.15: U2.4@27.853,81.757 27.853,82.46 ; R4.2@27.853,82.932 27.853,82.46 ; U2.5@28.353,81.757 28.353,82.332 28.225,82.46 27.853,82.46
NetR13_1: R13.1 R14.2 U3.3 | length 2.9
  Bottom Layer w0.15: U3.3@27.975,56.885 28.425,56.885 29.225,57.685 R14.2@29.725,57.685 R13.1@30.525,57.685
NetR17_1: R17.1 U7.4 | length 1.8
  Bottom Layer w0.3: R17.1@8.3,58.375 R17.1@8.325,58.4
  Bottom Layer w0.35: U7.4@8.3,56.605 R17.1@8.3,58.375
RTX: J6.47 J11.1 | length 21
  Top Layer w0.15: J6.47@16.8,25.985 16.8,25.035 16.935,24.9 28.638,24.9 28.773,25.035 30.326,25.035 30.515,25.224 30.515,28.365 31.65,29.5 J11.1@33.05,29.5
RX_P: J6.62 R1.15 | length 10.6
  Top Layer w0.15: v1(12.65,36.1) 12.65,35.41 13.05,35.01 J6.62@13.05,33.535
  Bottom Layer w0.15: R1.15@10.15,42.235 10.16,42.225 11.375,42.225 12.65,40.95 v1(12.65,36.1)
SIM_CLK: J6.14 R8.1 | length 58.2
  Top Layer w0.15: v1(21.746,27.26) 21.746,28.656 25.05,31.96 J6.14@25.05,33.29
  Bottom Layer w0.15: v1(21.746,27.26) 21.246,26.76 10,26.76 6.3,23.06 6.3,19.26 9.86,15.7 23.038,15.7 24,14.738 24,7.035 24.375,6.66 R8.1@26.35,6.66
SIM_IO: J6.12 R9.1 | length 54
  Top Layer w0.15: v1(22.508,27.26) 22.508,28.743 25.55,31.785 J6.12@25.55,33.448
  Bottom Layer w0.15: v1(22.508,27.26) 21.708,26.46 11.46,26.46 7.9,22.9 7.09,22.9 6.7,22.51 6.7,19.7 10.165,16.235 24.325,16.235 25.075,15.485 25.075,10.385 R9.1@24.55,9.86
SIM_NPRESENT: J5.13 J6.16 TVS2.6 | length 64
  Top Layer w0.15: v1(20.961,27.46) 20.961,28.621 24.55,32.21 J6.16@24.55,33.672 ; v1(28.45,10.195) 30.18,10.195 v1(31.275,11.29)
  Bottom Layer w0.15: v1@20.961,27.26 v1(20.961,27.46) 21.36,27.86 23.575,27.86 23.95,27.485 23.95,26.96 22.85,25.86 12,25.86 8.896,22.756 8.896,18.939 10.85,16.985 27.725,16.985 30.375,14.335 J5.13@30.375,11.29 v1(31.275,11.29) ; TVS2.6@27.65,10.665 27.98,10.665 v1(28.45,10.195)
SIM_RST: J6.10 R7.1 | length 49.5
  Top Layer w0.15: v1(23.293,27.26) 23.293,28.853 26.05,31.61 J6.10@26.05,33.448
  Bottom Layer w0.15: v1(23.293,27.26) 22.193,26.16 11.8,26.16 8.543,22.903 8.543,18.792 10.725,16.61 25.175,16.61 26.2,15.585 R7.1@26.2,13.06
SIM_VCC: C5.2 J5.1 J6.8 R6.2 TVS2.3 | length 90.3
  Top Layer w0.15: v1(24.55,27.26) 24.55,29.435 26.55,31.435 J6.8@26.55,33.535
  Bottom Layer w0.15: v1(24.55,27.26) 24.55,26.585 23.525,25.56 12.2,25.56 9.25,22.61 9.25,19.085 10.975,17.36 27.85,17.36 32.05,13.16 35.45,13.16 36.35,14.06 41.05,14.06 41.575,13.535 41.575,9.785 40.975,9.185 40.55,9.185 ; R6.2@25.55,8.96 25.55,8.135 26.725,8.135 26.875,7.985 26.875,6.185 27.1,5.96 29.45,5.96 30.55,7.06 30.55,8.235 31.5,9.185 40.55,9.185 ; 26.65,8.135 TVS2.3@26.65,9.055 ; J5.1@40.55,8.3 40.55,9.185
SW_SCL: J7.1 J8.1 J9.4 R15.1 U1.1 | length 105.8
  Top Layer w0.15: J7.1@21.85,-5.24 J7.1@21.85,-5.651 21.85,-6.09 23.225,-7.465 33.8,-7.465 37.15,-4.115 37.15,1.36 39.7,3.91 39.7,71.79 J9.4@43.05,75.14 ; 31.55,-7.44 J8.1@31.55,-5.651 31.639,-5.74 v1(32.425,-5.74)
  Bottom Layer w0.15: U1.1@31.745,-3.59 32.29,-3.59 32.425,-3.725 32.425,-4.915 ; R15.1@31.925,-4.915 32.425,-4.915 ; v1(32.425,-5.74) 32.425,-4.915
SW_SDA: J7.2 J8.2 J9.3 R10.1 U1.8 | length 105.6
  Top Layer w0.15: J7.2@20.85,-5.651 20.85,-4.64 21.625,-3.865 30.55,-3.865 ; J8.2@30.55,-5.651 30.55,-3.865 ; J9.3@43.05,77.68 39.325,73.955 39.325,4.065 36.775,1.515 36.775,-3.715 36.25,-4.24 v1(34.6,-4.24) 34.225,-3.865 30.55,-3.865
  Bottom Layer w0.15: U1.8@34.555,-3.59 36.125,-3.59 R10.1@36.15,-3.565 ; v1(34.6,-4.24) U1.8@34.6,-3.635
TX_P: J6.64 R1.16 | length 9.7
  Top Layer w0.15: v1(11.8,36.1) 11.8,35.742 12.55,34.992 J6.64@12.55,33.535
  Bottom Layer w0.15: R1.16@10.15,41.525 11.425,41.525 11.75,41.2 v1@11.75,36.1
V+: DS1.1 DS1.2 J1.2 J10.7 | length 40.3
  Top Layer w0.6: J1.2@8.05,84.385 v1@9.475,84.385 ; J1.2@8.05,85.51 v1@9.475,85.51 ; J1.2@8.05,86.635 v1@9.475,86.635
  Bottom Layer w0.6: J10.7@-4.95,67.52 -1.7,70.77 -1.7,73.46 -0.215,74.945 3.835,74.945 5.6,76.71 5.6,81.36 6.55,82.31 8.8,82.31 9.475,82.985 v1(9.475,86.66) 12.925,86.66 13.385,86.2 DS1.1@13.385,84.885 ; DS1.2@11.415,84.885 11.415,86.65
  other v1: 9.475,84.41 9.475,85.535
VBAT: C2.2 DS2.1 DS2.2 J3.2 J10.3 R2.2 U2.10 | length 46.6
  Top Layer w0.6: 20.05,82.01 v1(21.8,82.01) ; 20.05,82.835 v1(21.8,82.835)
  Top Layer w1: 0.1,77.51 0.64,78.05 2.89,80.3 18.34,80.3 20.05,82.01 20.05,82.835 J3.2@20.05,84.385
  Mid Layer 3 w1.6: J10.3@-4.95,77.68 0.475,77.68
  Bottom Layer w0.25: C2.2@26.3,78.26 R2.2@27.275,78.26 ; C2.2@26.353,78.463 U2.10@26.353,79.857
  Bottom Layer w0.6: v1(21.8,82.835) DS2.2@21.8,80.745 DS2.1@21.8,78.775 21.8,77.606 22.496,76.91 25.6,76.91 26.3,77.61 26.3,78.26 C2.2@26.3,78.41
  other v1: -0.2,77.315 0.625,77.315 -0.2,78.065 0.625,78.065